# EAGLE board tx_board (EAGLE 9.6.2)
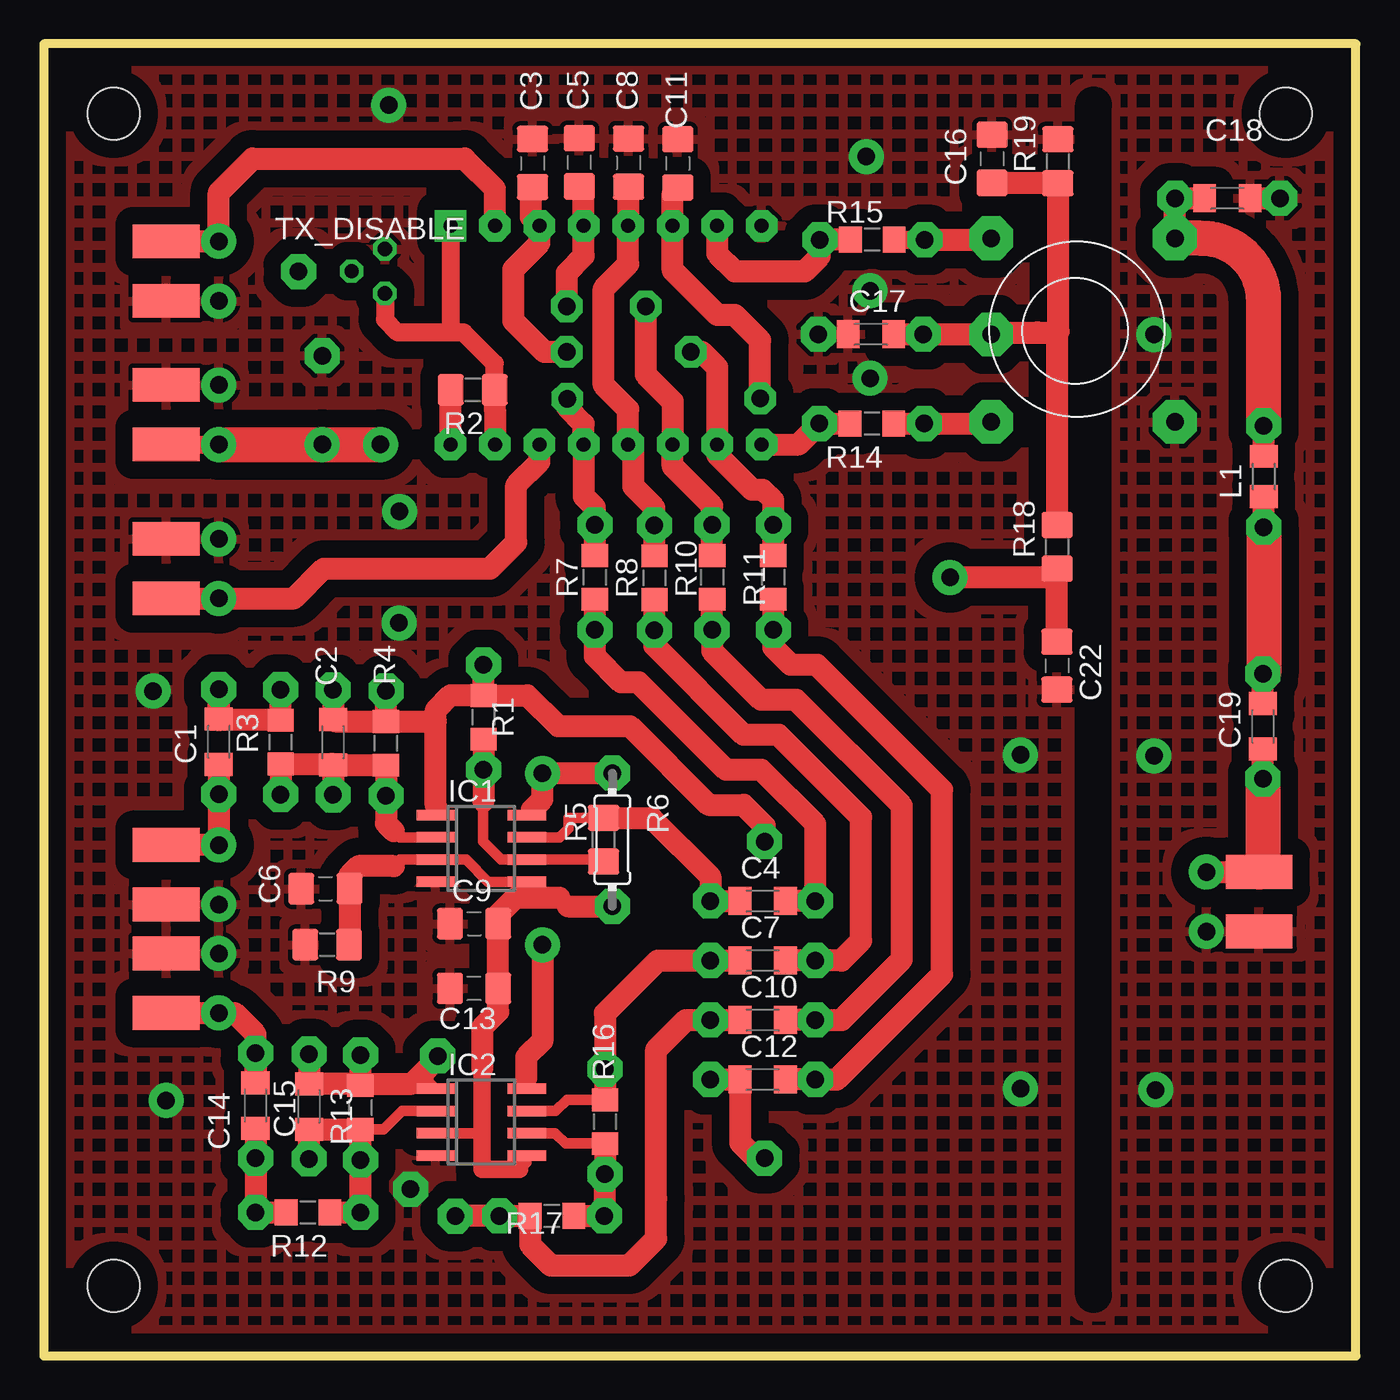
[diagram p0: board, top side]
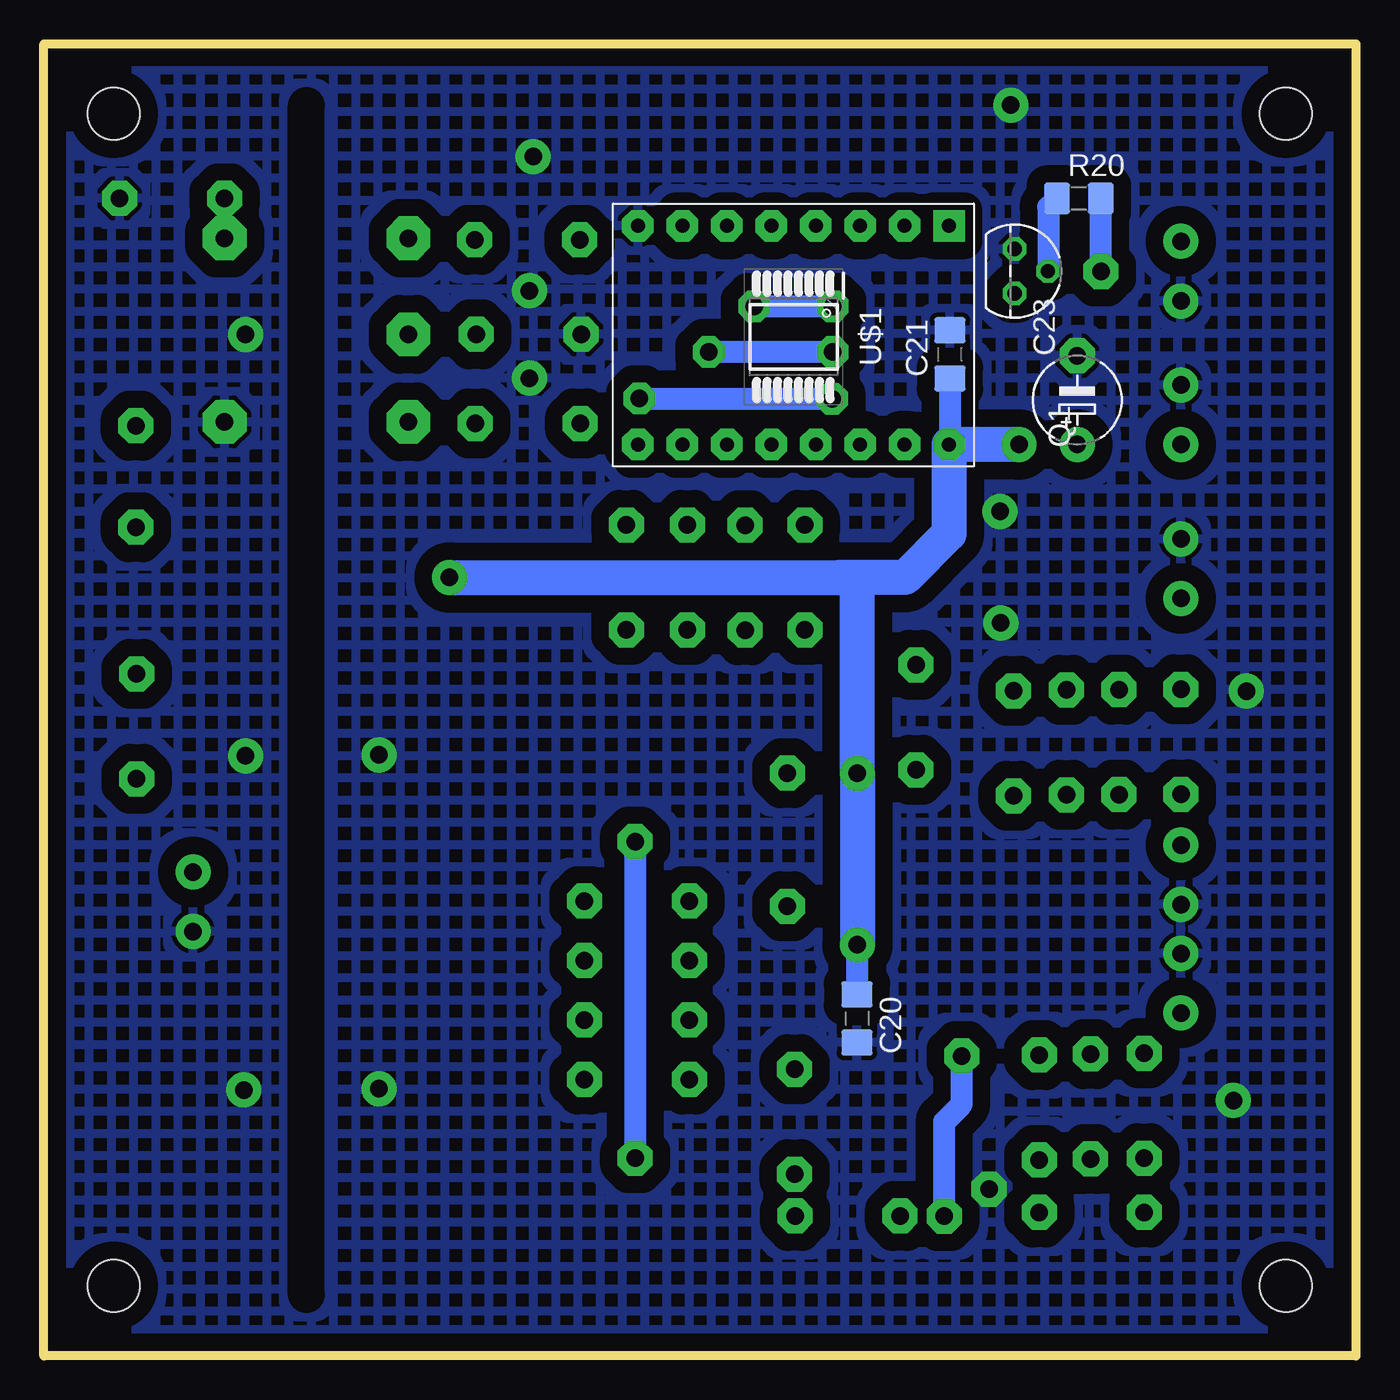
[diagram p1: board, bottom side, seen from below]

Size 75 x 75 mm. Coordinates in mm from the lower left corner, seen from the top.
Outline: 0,0 75,0 75,75 0,75 0,0
Copper layers (1*16): Top 0.035mm / dielectric 1.5mm / Bottom 0.035mm
Design rules "default": minimum track width 6mil, minimum drill 0.35mm, track to track 6mil, track to pad 6mil, pad to pad 6mil, via to via 6mil, smd to smd 6mil, copper to edge 40mil, drill to drill 6mil, minimum pad ring 10mil, minimum via ring 8mil, stop-mask expansion 4mil, vias tented up to drill 0mil, thermal gap 10mil
Holes 3 mm at 4,4 4,71 71,4 71,71
tRestrict: 1 lines
bRestrict: 1 lines

## Footprints (pad centres in the part's own frame; a part is rotated, then mirrored left to right if it is on the bottom)
2X_SMD_PTH = smd 3.81 x 1.93: P$1 0,1.7; P$2 0,-1.7 | drill 1 pad 2: T$1 3,1.7; T$2 3,-1.7
C0805K = smd 1.3 x 1.6: 1 -1.3,0; 2 1.3,0 | drill 1 pad 2 octagon: P$1 -3,0; P$2 3,0
C0805 = smd 1.5 x 1.8: 1 -1.377,0; 2 1.377,0
E5-5 = drill 1 pad 2: + -2.54,0 | drill 1 pad 2 octagon: - 2.54,0
SO08 = smd 0.6 x 2.2: 1 -1.905,-2.6; 2 -0.635,-2.6; 3 0.635,-2.6; 4 1.905,-2.6; 5 1.905,2.6; 6 0.635,2.6; 7 -0.635,2.6; 8 -1.905,2.6
M0805 = smd 1.3 x 1.6: 1 -1.15,0; 2 1.15,0 | drill 1 pad 2 octagon: P$1 -2.9,0; P$2 2.9,0
TO92D = drill 0.813 octagon: B 0,1.905; C 1.27,0; E -1.27,0
R0805 = smd 1.3 x 1.5: 1 -1.25,0; 2 1.25,0 | drill 1 pad 2 octagon: P$1 -3,0; P$2 3,0
R0805W = smd 1.5 x 1.8: 1 -1.252,0; 2 1.252,0
0204/7 = drill 1 pad 2 octagon: 1 -3.81,0; 2 3.81,0
5PIN_TRANSFORMER = drill 1 pad 2.5 octagon: P$1 1.5,1.5; P$2 1.5,12; P$3 12,12; P$4 12,7; P$5 12,1.5
PINHD1 = drill 1 pad 2 octagon: P$1 0,0
SSOP16_ADAPTER = drill 0.8 pad 1.8 square: P$1 0,0 | drill 0.8 pad 1.8 octagon: P$2 0,-2.54; P$3 0,-5.08; P$4 0,-7.62; P$5 0,-10.16; P$6 0,-12.7; P$7 0,-15.24; P$8 0,-17.78; P$9 12.5,-17.78; P$10 12.5,-15.24; P$11 12.5,-12.7; P$12 12.5,-10.16; P$13 12.5,-7.62; P$14 12.5,-5.08; P$15 12.5,-2.54; P$16 12.5,0

## Placement (x,y rotation side)
5VDC  2X_SMD_PTH_PIN  [2X_SMD_PTH]  7,53.8 0 top
C1  10uF  [C0805K]  10,35.1 90 top
C2  100pF  [C0805K]  16.54,35.07 90 top
C3  0.022uF  [C0805]  27.94,68.18 270 top
C4  10uF  [C0805K]  41.1,26 0 top
C5  0.022uF  [C0805]  30.61,68.22 270 top
C6  100nF  [C0805]  16.1,26.7 0 top
C7  10uF  [C0805K]  41.1,22.6 0 top
C8  0.022uF  [C0805]  33.43,68.2 270 top
C9  4.7uF  [C0805]  24.6,24.7 0 top
C10  10uF  [C0805K]  41.1,19.2 0 top
C11  0.022uF  [C0805]  36.24,68.16 270 top
C12  10uF  [C0805K]  41.1,15.8 0 top
C13  100nF  [C0805]  24.6,21 180 top
C14  10uF  [C0805K]  12.1,14.3 270 top
C15  100pF  [C0805K]  15.16,14.25 90 top
C16  [C0805]  54.21,68.42 270 top
C17  [C0805K]  47.28,58.39 0 top
C18  [C0805K]  67.66,66.17 0 top
C19  [C0805K]  69.69,35.98 90 top
C20  [C0805]  28.51,19.28 270 bottom
C21  [C0805]  23.2,57.24 90 bottom
C22  [C0805]  57.92,39.45 270 top
C23  [E5-5]  15.92,54.63 90 bottom
CLK0  2X_SMD_PTH_PIN  [2X_SMD_PTH]  7,45 0 top
CLK1  2X_SMD_PTH_PIN  [2X_SMD_PTH]  7,62 0 top
IC1  NE5532D  [SO08]  25,29 270 top
IC2  NE5532D  [SO08]  25,13.36 270 top
L1  [M0805]  69.74,50.26 90 top
LINE_OUT_IN_L  2X_SMD_PTH_PIN  [2X_SMD_PTH]  7,21.3 0 top
LINE_OUT_IN_R  2X_SMD_PTH_PIN  [2X_SMD_PTH]  7,27.5 0 top
Q1  2N3904  [TO92D]  19.5,62 270 bottom
R1  10k  [R0805]  25.14,36.5 90 top
R2  4.99k  [R0805W]  24.52,55.22 180 top
R3  10k  [R0805]  13.54,35.08 90 top
R4  10k  [R0805]  19.56,35.01 270 top
R5  10k  [R0805W]  32,29.5 270 top
R6  2.2k  [0204/7]  32.5,29.5 90 top
R7  50k  [R0805]  31.5,44.5 270 top
R8  50k  [R0805]  34.91,44.48 270 top
R9  2.2k  [R0805W]  16.2,23.5 0 top
R10  50k  [R0805]  38.21,44.5 270 top
R11  50k  [R0805]  41.7,44.5 270 top
R12  10k  [R0805]  15.1,8.2 180 top
R13  10k  [R0805]  18.1,14.19 270 top
R14  50k  [R0805]  47.34,53.29 180 top
R15  50k  [R0805]  47.36,63.8 180 top
R16  10k  [R0805]  32.08,13.38 270 top
R17  10k  [R0805]  29.05,8 180 top
R18  3.3k  [R0805W]  57.93,46.24 90 top
R19  2.2k  [R0805W]  57.97,68.28 90 top
R20  22k  [R0805W]  15.83,66.16 0 bottom
RF_OUT  2X_SMD_PTH_PIN  [2X_SMD_PTH]  69.47,25.95 180 top
TR1  [5PIN_TRANSFORMER]  66.16,65.38 180 top
TX_DISABLE  PINHD_X_1  [PINHD1]  14.56,61.98 0 top
U$1  FST3253_ON_ADAPTER  [SSOP16_ADAPTER]  23.25,64.6 270 bottom

## Library data of the parts
5VDC C1-C23 CLK0 CLK1 L1 LINE_OUT_IN_L LINE_OUT_IN_R R1-R5 R7-R20 RF_OUT TR1 TX_DISABLE U$1 = mylib
IC1 IC2 = linear
Q1 = transistor-small-signal
R6 = rcl; SPICEPREFIX: R

## Nets
0: C3.2 R11.1 R11.P$1 U$1.P$3 U$1.P$10
5V: 5VDC.P$2 5VDC.T$2 C20.1 C21.1 C22.1 C23.+ IC1.8 IC2.8 R2.2 R6.2 R18.1 U$1.P$16
90: C5.2 R10.1 R10.P$1 U$1.P$4 U$1.P$11
180: C11.2 R7.1 R7.P$1 U$1.P$6 U$1.P$13
270: C8.2 R8.1 R8.P$1 U$1.P$5 U$1.P$12
CLK0: CLK0.P$2 CLK0.T$2 U$1.P$14
CLK1: CLK1.P$1 CLK1.T$1 U$1.P$2
GND: 5VDC.P$1 5VDC.T$1 C3.1 C5.1 C6.1 C8.1 C9.1 C11.1 C13.2 C16.1 C17.1 C17.P$1 C18.2 C18.P$2 C20.2 C21.2 C22.2 C23.- CLK0.P$1 CLK0.T$1 CLK1.P$2 CLK1.T$2 IC1.4 IC2.4 LINE_OUT_IN_L.P$1 LINE_OUT_IN_L.T$1 LINE_OUT_IN_R.P$2 LINE_OUT_IN_R.T$2 Q1.E R9.1 R19.2 RF_OUT.P$1 RF_OUT.T$1 TR1.P$2 U$1.P$8
N$1: Q1.C R2.1 U$1.P$1 U$1.P$15
N$2: R15.2 R15.P$2 U$1.P$7
N$3: R14.2 R14.P$2 U$1.P$9
N$4: R14.1 R14.P$1 TR1.P$3
N$5: R15.1 R15.P$1 TR1.P$5
N$6: C16.2 C17.2 C17.P$2 R18.2 R19.1 TR1.P$4
N$7: C2.1 C2.P$1 IC1.2 R3.1 R3.P$1 R4.2 R4.P$2
N$8: C18.1 C18.P$1 L1.2 L1.P$2 TR1.P$1
N$9: C19.2 C19.P$2 L1.1 L1.P$1
N$10: C2.2 C2.P$2 C12.1 C12.P$1 IC1.1 R1.2 R1.P$2 R4.1 R4.P$1
N$11: IC1.6 R1.1 R1.P$1 R5.2
N$12: C15.1 C15.P$1 IC2.2 R12.1 R12.P$1 R13.2 R13.P$2
N$13: C10.1 C10.P$1 C15.2 C15.P$2 IC2.1 R13.1 R13.P$1 R17.2 R17.P$2
N$14: IC2.6 R16.2 R16.P$2 R17.1 R17.P$1
N$15: C4.1 C4.P$1 IC1.7 R5.1
N$16: C7.1 C7.P$1 IC2.7 R16.1 R16.P$1
N$17: C4.2 C4.P$2 R7.2 R7.P$2
N$18: C19.1 C19.P$1 RF_OUT.P$2 RF_OUT.T$2
N$19: C1.1 C1.P$1 LINE_OUT_IN_R.P$1 LINE_OUT_IN_R.T$1
N$20: C14.1 C14.P$1 LINE_OUT_IN_L.P$2 LINE_OUT_IN_L.T$2
N$21: Q1.B R20.1
N$22: C14.2 C14.P$2 R12.2 R12.P$2
N$23: C1.2 C1.P$2 R3.2 R3.P$2
N$24: R20.2 TX_DISABLE.P$1
N$25: C12.2 C12.P$2 R11.2 R11.P$2
N$26: C10.2 C10.P$2 R10.2 R10.P$2
N$27: C7.2 C7.P$2 R8.2 R8.P$2
N$29: C6.2 C9.2 C13.1 IC1.3 IC1.5 IC2.3 IC2.5 R6.1 R9.2

## Tracks (layer width: path | path; a pad name or v marks a point on that pad's centre or on a via)
0  (via drill 1 pad 1.8)
  Top 1.27: v29.89,57.38 28.62,57.38 26.83,59.17 26.83,60 26.83,62.1 28.33,63.6 U$1.P$3 27.83,65.1 27.83,66.69 C3.2 | v36.99,57.38 37.62,57.38 38.49,56.51 38.49,53.6 U$1.P$10 38.49,51.51 40.5,49.5 41.11,49.5 41.7,48.91 R11.P$1 R11.1
  Bottom 1.27: v29.89,57.38 v36.99,57.38
5V  (via drill 1 pad 2)
  Top 0.61: IC1.8 27.9,31.2 | 27.58,15.91 27.58,15.29 IC2.8
  Top 1.016: 5VDC.P$2 5VDC.T$2
  Top 1.27: R6.2 v28.5,33.3 28.5,31.8 27.9,31.2 | v51.81,44.5 57.44,44.5 R18.1 57.92,44.98 C22.1 | v28.5,23.5 28.5,18 27.58,17.08 27.58,15.91 | U$1.P$16 23.25,55.2 R2.2
  Top 2: 5VDC.T$2 C23.+ v19.24,52.09 v19.25,52.1
  Bottom 1.27: C21.1 23.2,52.15 U$1.P$16 | C20.1 v28.5,23.5 | v19.25,52.1 v19.24,52.09 v19.25,52.1
  Bottom 2: v19.25,52.1 U$1.P$16 23.25,47 25.75,44.5 28.5,44.5 | 28.5,44.5 29.5,44.5 v51.81,44.5 | 28.5,44.5 v28.5,33.3 v28.5,23.5
90  (via drill 1 pad 1.8)
  Top 1.27: C5.2 30.87,66.58 U$1.P$4 30.87,62.87 29.9,61.9 v29.9,60 | v34.4,60 34.4,56.1 35.95,54.55 U$1.P$11 35.95,50.85 38.21,48.59 R10.P$1 R10.1
  Bottom 1.27: v34.4,60 v29.9,60
180  (via drill 1 pad 1.8)
  Top 1.27: C11.2 36.24,66.74 35.95,66.45 U$1.P$6 35.95,62.05 38.5,59.5 39.5,59.5 40.95,58.05 v40.95,54.72 | v29.93,54.71 29.93,54.21 30.87,53.27 U$1.P$13 30.87,49.13 31.5,48.5 R7.P$1 R7.1
  Bottom 1.27: v40.95,54.72 v40.94,54.71 v29.93,54.71
270
  Top 1.27: C8.2 33.41,66.8 U$1.P$5 33.41,62.41 32,61 32,55.5 33.41,54.09 U$1.P$12 33.69,51.82 33.69,49.7 34.91,48.48 R8.P$1 R8.1
CLK0
  Top 1.27: U$1.P$14 28.33,51.1 27,49.77 27,46.5 25.5,45 16,45 14.3,43.3 CLK0.T$2 CLK0.P$2
CLK1
  Top 1.27: U$1.P$2 25.79,66.71 24.06,68.44 11.94,68.44 10,66.5 CLK1.T$1 CLK1.P$1
GND  (via drill 1 pad 2)
  Top 1.27: C18.2 C18.P$2
  other vias: 19.72,71.49 20.33,48.26 6.25,38 63.47,34.3 55.83,34.35 63.56,15.2 6.99,14.6 47.23,55.88 47.23,60.88 63.46,58.38 20.96,9.52 20.3,41.9 55.84,15.26 47.02,68.55
  pour Top (isolate 1, hatched): 77.5,-2.5 -2,-2.5 -2,80.5 77.5,80.5
  pour Bottom (isolate 1, hatched): 78,-3 -3,-3 -3,78 78,78
N$1
  Top 1.016: R2.1 25.77,56.73 24,58.5 23,58.5 | 23,58.5 20.23,58.5 19.5,59.23 Q1.C | U$1.P$1 23.25,58.75 23,58.5
  Top 1.27: R2.1 25.77,54.12 25.79,54.1 U$1.P$15
N$2
  Top 1.27: R15.2 R15.P$2 44.36,62.86 43.5,62 39.5,62 38.49,63.01 U$1.P$7
N$3
  Top 1.27: U$1.P$9 43.15,52.1 R14.P$2 R14.2
N$4
  Top 1.27: R14.1 R14.P$1 54.07,53.29 TR1.P$3
N$5
  Top 1.016: R15.1 R15.P$1
  Top 1.27: TR1.P$5 54.08,63.8 R15.P$1
N$6
  Top 1.27: R18.2 57.93,58.5 56.79,58.5 | 56.79,58.5 54.28,58.5 TR1.P$4 C17.P$2 C17.2 | 56.79,58.5 56.8,58.5 57.94,58.5 58,58.56 58,67 R19.1 54.23,67.03 C16.2
N$7
  Top 0.61: IC1.2 20.36,29.64 20,30
  Top 1.27: R3.P$1 R3.1 16.48,33.83 C2.1 | C2.1 R4.2 R4.P$2 19.56,30.44 20,30 | C2.1 C2.P$1
N$8
  Top 1.27: L1.2 L1.P$2 | TR1.P$1 C18.P$1 C18.1
  Top 2: L1.P$2 69.74,60.3 arc90 66.16,63.88 TR1.P$1
N$9
  Top 1.27: L1.P$1 L1.1 | C19.2 C19.P$2
  Top 2: L1.P$1 69.74,39.03 arc-90 C19.P$2
N$10  (via drill 1 pad 2)
  Top 0.61: IC1.1 22.4,31.45
  Top 1.27: R4.1 16.65,36.26 C2.2 C2.P$2 | R4.1 R4.P$1 | R4.1 22.4,36.26 | R1.2 23.26,37.76 22.4,36.9 22.4,36.26 | R1.2 R1.P$2 | 22.4,31.45 22.4,36.26 | R1.2 27.64,37.75 29.4,35.99 33.51,35.99 38,31.5 40,31.5 41.2,30.3 v41.2,29.4 | C12.P$1 C12.1 39.8,13.8 39.8,12.2 40.7,11.3 v41.2,11.3
  Bottom 1.27: v41.2,29.4 v41.2,11.3
N$11
  Top 0.61: R5.2 31.88,28.36 IC1.6 26.14,28.36 25.1,29.4 25.1,31.69 25.12,31.71
  Top 1.27: R1.1 R1.P$1 25.14,31.73 25.12,31.71
N$12
  Top 0.61: 21.91,14 21.91,13.99 IC2.2 20.5,13.99 19.44,12.94 R13.2
  Top 1.27: R12.1 R12.P$1 R13.P$2 R13.2 C15.1 C15.P$1
N$13  (via drill 1 pad 2)
  Top 0.61: IC2.1 22,15.66 22,16.5
  Top 1.27: 18.21,15.55 R13.1 | R13.1 R13.P$1 | R13.1 17.99,15.55 C15.2 C15.P$2 | v23.52,7.98 23.55,8.01 R17.P$2 R17.2 27.8,6.35 28.98,5.17 33.48,5.17 35,6.69 35,9 35,17.5 36.7,19.2 C10.P$1 C10.1 | 18.21,15.55 R13.1 | 18.21,15.55 21.05,15.55 22,16.5 22.52,17.02 v22.52,17.14
  Bottom 1.27: v23.52,7.98 23.52,13.38 22.52,14.38 v22.52,17.14
N$14
  Top 0.61: IC2.6 29.23,12.72 29.82,12.14 R16.2
  Top 1.27: R16.2 R16.P$2 32.08,8.03 R17.P$1 R17.1
N$15
  Top 0.61: IC1.7 29.48,29.64 30,30.15 30,30.75 R5.1
  Top 1.27: R5.1 34.75,30.75 38.1,27.4 C4.P$1 C4.1
N$16
  Top 0.61: IC2.7 29.27,14 29.91,14.64 32.07,14.64 R16.1
  Top 1.27: R16.1 R16.P$1 32.08,19.58 35.1,22.6 C7.P$1 C7.1
N$17
  Top 1.27: C4.2 C4.P$2 44.1,30.4 41,33.5 39,33.5 34,38.5 33,38.5 31.5,40 R7.P$2 R7.2
N$18
  Top 1.27: RF_OUT.T$2 RF_OUT.P$2 | C19.P$1 C19.1
  Top 2: C19.P$1 69.69,27.87 arc-90 RF_OUT.P$2
N$19
  Top 1.27: C1.1 C1.P$1 LINE_OUT_IN_R.T$1 LINE_OUT_IN_R.P$1
N$20
  Top 1.27: C14.P$1 C14.1 12.1,18.4 10.9,19.6 LINE_OUT_IN_L.T$2 LINE_OUT_IN_L.P$2
N$21
  Bottom 1.27: R20.1 17.58,65.66 17.58,62.01 Q1.B
N$22
  Top 1.27: C14.2 C14.P$2 R12.P$2 R12.2
N$23
  Top 1.27: R3.P$2 R3.2 10,36.33 C1.P$2 C1.2
N$24
  Bottom 1.27: TX_DISABLE.P$1 14.58,62 R20.2
N$25
  Top 1.27: C12.2 C12.P$2 45.34,15.8 51.35,21.81 51.35,32.35 44.2,39.5 42.7,39.5 41.7,40.5 R11.P$2 R11.2
N$26
  Top 1.27: C10.2 C10.P$2 45.6,19.2 49.05,22.65 49.05,31.45 43,37.5 41,37.5 38.21,40.29 R10.P$2 R10.2
N$27
  Top 1.27: C7.2 C7.P$2 45.6,22.6 46.72,23.72 46.72,30.78 42,35.5 40,35.5 34.91,40.59 R8.P$2 R8.2
N$29
  Top 0.508: IC1.5 27.5,27
  Top 0.61: 20,28 20.36,28.36 IC1.3 24.14,28.36 25.41,27.09 IC1.5 27.6,26.56 27.97,26.19 | IC2.3 24.82,12.72 25.05,12.5 25.07,12.48 | 29.47,26.19 29.97,25.69 | IC2.5 27.6,11.04 27.21,10.65
  Top 1: 25.07,16.43 25.07,12.48 25.07,10.65 27.21,10.65
  Top 1.27: 25.07,16.43 25.07,18.77 25.98,19.68 C13.1 C9.2 25.98,25.2 26.97,26.19 27.97,26.19 29.47,26.19 | 29.97,25.69 R6.1 | 20,28 18,28 17.48,27.48 C6.2 17.48,23.52 R9.2